# Altium PCB BackplanePCB.PcbDoc
Units mm, origin at the board's own origin, x right, y up, seen from the top; angles counter-clockwise.
Board outline 421.64 x 128.65 mm, 2 copper layers (Top Layer, Bottom Layer); 41 components, 109 nets, 458 pads, 12 vias.
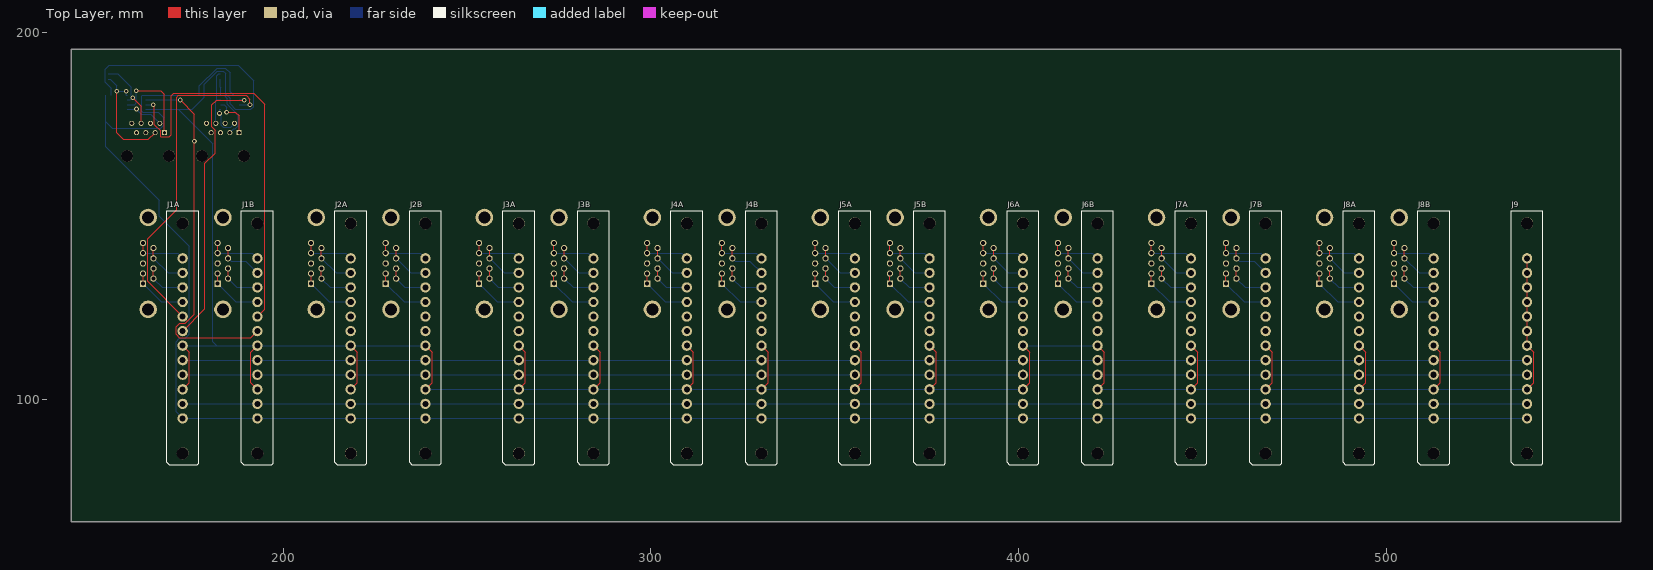
[diagram p0: Top Layer view]
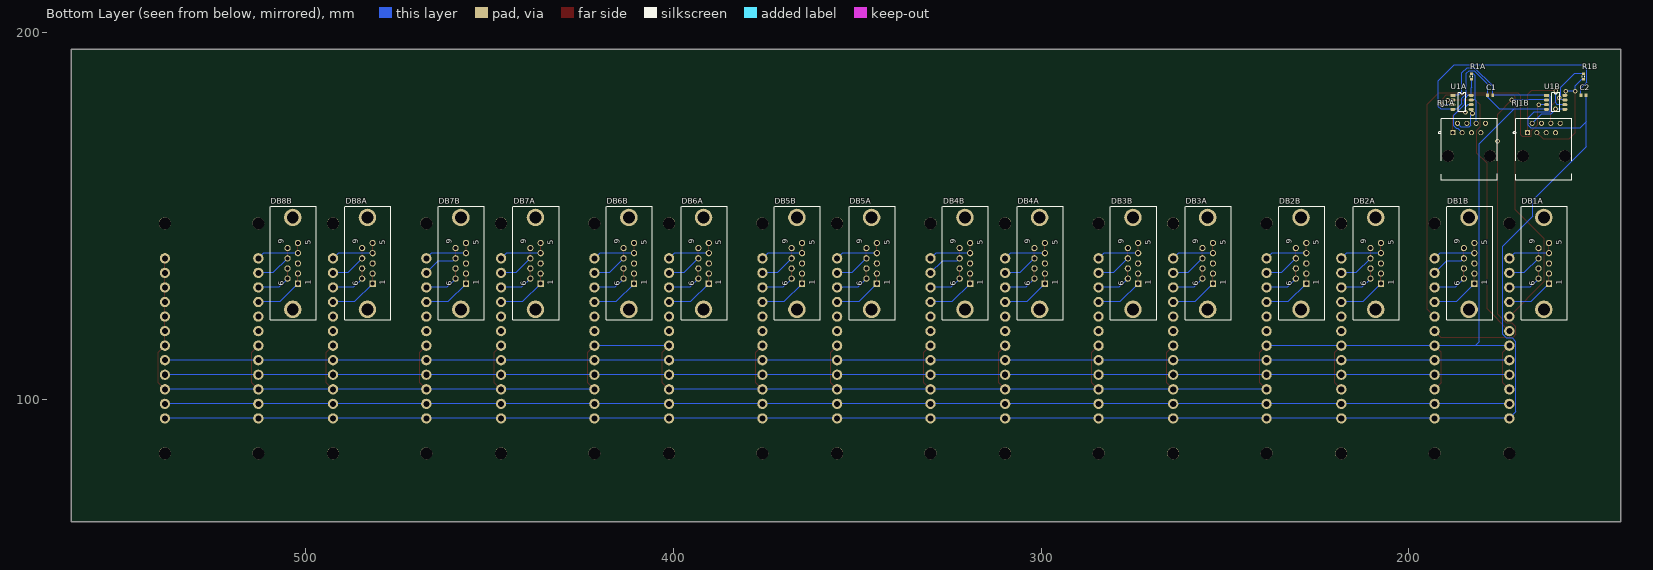
[diagram p1: Bottom Layer view, seen from below]
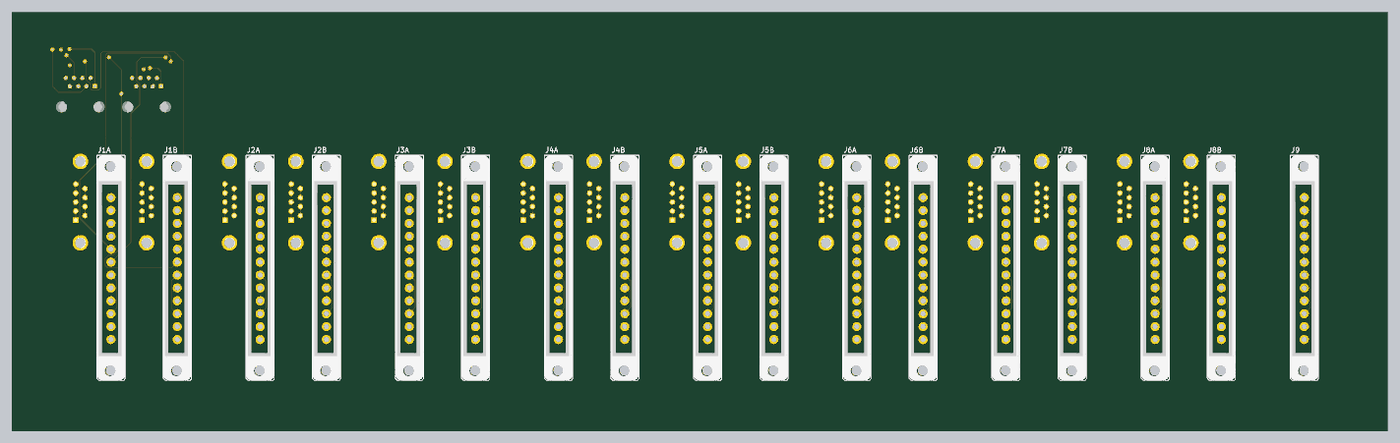
[diagram p2: 3D render of the assembled board from above, using the file's embedded part models]
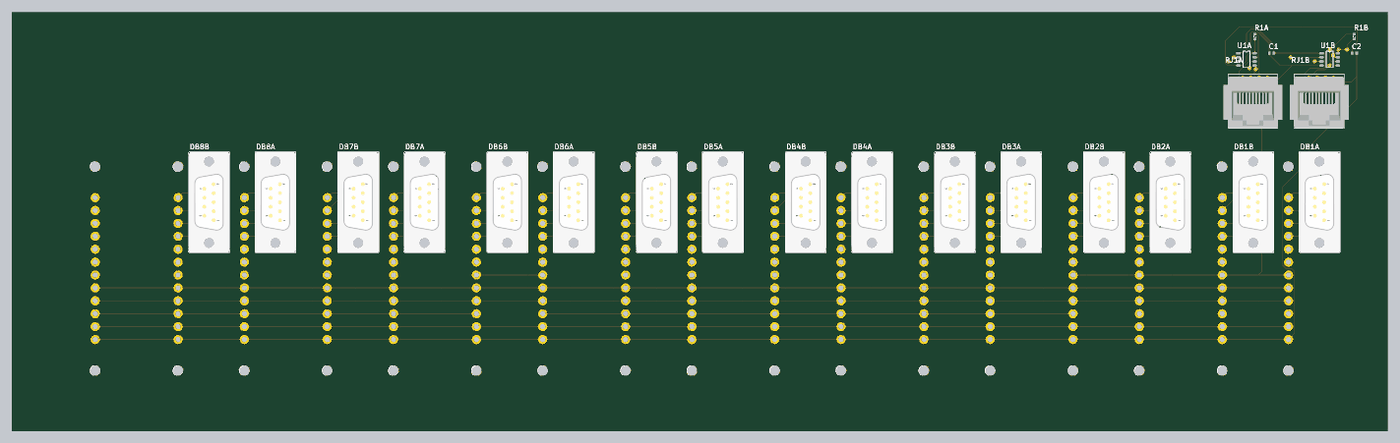
[diagram p3: 3D render of the assembled board from below, using the file's embedded part models]

## Layer stack, top to bottom
Top Solder: solder mask 0.0102, Solder Resist, Dk 3.5
Top Layer: signal copper 0.0356
Dielectric 1: dielectric 0.32, FR-4, Dk 4.8
Bottom Layer: signal copper 0.0356
Bottom Solder: solder mask 0.0102, Solder Resist, Dk 3.5

## Board outline
142.24,66.802 563.88,66.802 563.88,195.453 142.24,195.453

## Design rules (kind name [scope] priority, off if disabled: settings)
Clearance [All] p1: gap=0.254
PolygonConnect [All] p1: connectstyle=Relief reliefconductorwidth=0.254 reliefentries=4 polygonreliefangle="90 Angle" airgapwidth=0.254
RoutingVias [All] p1: holewidth=0.711 width=1.27 viastyle="Through Hole" minholewidth=0.711 minwidth=1.27 maxholewidth=0.711 maxwidth=1.27
SolderMaskExpansion [All] p1: expansion=0.102
UnpouredPolygon [All] p1: allowunpoured=FALSE
Width [All] p1: maxlimit=0.254 minlimit=0.254 preferedwidth=0.254
29 further rules are at their usual default settings.

## Classes and differential pairs
component class Backplane2: C1 C2 R1A R1B RJ1A RJ1B U1A U1B
component class Backplane: DB1A DB1B DB2A DB2B DB3A DB3B DB4A DB4B DB5A DB5B DB6A DB6B DB7A DB7B DB8A DB8B J1A J1B J2A J2B J3A J3B J4A J4B J5A J5B J6A J6B J7A J7B J8A J8B J9

## Components (designator, comment, footprint, x,y, rotation, side; value= is the part's Value field where it differs from the comment)
C1 "Cap Semi" 1608[0603] 177.8,182.88 r180 bottom
C2 "Cap Semi" 1608[0603] 152.4,182.88 r180 bottom
DB1A "D Connector 9" DSUB1.STRAIGHT 172.72,137.16 r90 bottom
DB1B "D Connector 9" DSUB1.STRAIGHT 193.04,137.16 r90 bottom
DB2A "D Connector 9" DSUB1.STRAIGHT 218.44,137.16 r90 bottom
DB2B "D Connector 9" DSUB1.STRAIGHT 238.76,137.16 r90 bottom
DB3A "D Connector 9" DSUB1.STRAIGHT 264.16,137.16 r90 bottom
DB3B "D Connector 9" DSUB1.STRAIGHT 284.48,137.16 r90 bottom
DB4A "D Connector 9" DSUB1.STRAIGHT 309.88,137.16 r90 bottom
DB4B "D Connector 9" DSUB1.STRAIGHT 330.2,137.16 r90 bottom
DB5A "D Connector 9" DSUB1.STRAIGHT 355.6,137.16 r90 bottom
DB5B "D Connector 9" DSUB1.STRAIGHT 375.92,137.16 r90 bottom
DB6A "D Connector 9" DSUB1.STRAIGHT 401.32,137.16 r90 bottom
DB6B "D Connector 9" DSUB1.STRAIGHT 421.64,137.16 r90 bottom
DB7A "D Connector 9" DSUB1.STRAIGHT 447.04,137.16 r90 bottom
DB7B "D Connector 9" DSUB1.STRAIGHT 467.36,137.16 r90 bottom
DB8A "D Connector 9" DSUB1.STRAIGHT 492.76,137.16 r90 bottom
DB8B "D Connector 9" DSUB1.STRAIGHT 513.08,137.16 r90 bottom
J1A "EDGECONNECTOR12" EDGECONNECTOR12 172.72,116.84 r90 top
J1B "EDGECONNECTOR12" EDGECONNECTOR12 193.04,116.84 r90 top
J2A "EDGECONNECTOR12" EDGECONNECTOR12 218.44,116.84 r90 top
J2B "EDGECONNECTOR12" EDGECONNECTOR12 238.76,116.84 r90 top
J3A "EDGECONNECTOR12" EDGECONNECTOR12 264.16,116.84 r90 top
J3B "EDGECONNECTOR12" EDGECONNECTOR12 284.48,116.84 r90 top
J4A "EDGECONNECTOR12" EDGECONNECTOR12 309.88,116.84 r90 top
J4B "EDGECONNECTOR12" EDGECONNECTOR12 330.2,116.84 r90 top
J5A "EDGECONNECTOR12" EDGECONNECTOR12 355.6,116.84 r90 top
J5B "EDGECONNECTOR12" EDGECONNECTOR12 375.92,116.84 r90 top
J6A "EDGECONNECTOR12" EDGECONNECTOR12 401.32,116.84 r90 top
J6B "EDGECONNECTOR12" EDGECONNECTOR12 421.64,116.84 r90 top
J7A "EDGECONNECTOR12" EDGECONNECTOR12 447.04,116.84 r90 top
J7B "EDGECONNECTOR12" EDGECONNECTOR12 467.36,116.84 r90 top
J8A "EDGECONNECTOR12" EDGECONNECTOR12 492.76,116.84 r90 top
J8B "EDGECONNECTOR12" EDGECONNECTOR12 513.08,116.84 r90 top
J9 "EDGECONNECTOR12" EDGECONNECTOR12 538.48,116.84 r90 top
R1A "" J1-0603 182.88,187.96 r90 bottom
R1B "" J1-0603 152.4,187.96 r90 bottom
RJ1A "85504-5001" RJ45.STRAIGHT 187.96,172.72 r180 bottom
RJ1B "85504-5001" RJ45.STRAIGHT 167.64,172.72 r180 bottom
U1A "SP3084EEN-L" SOICN8 187.96,182.88 r180 bottom
U1B "SP3084EEN-L" SOICN8 162.48,182.88 r180 bottom

## Footprints (in the part's own frame and the unit in brackets; to place one, negate y for a bottom-side part, rotate by r counter-clockwise, add the part's x,y. Pads: shape width x height; smd on the part's side, far side on the other; paste and mask are expansions set on the pad)
1608[0603] [mm] "Chip Capacitor, Body 1.6x0.8mm, IPC High Density"
  rect 0.8x0.9 smd: 1(-0.7,0) 2(0.7,0)
  body extent -0.87,-0.48 0.87,0.48, height 1.3
DSUB1.STRAIGHT [mm]
  round 4.76 hole 3.26: 0(-12.495,-9.5) 0(12.495,-9.5)
  rect 1.69x1.69 hole 1.09: 1(-5.54,-10.92)
  round 1.69 hole 1.09: 2(-2.77,-10.92) 3(0,-10.92) 4(2.77,-10.92) 5(5.54,-10.92) 6(-4.155,-8.08) 7(-1.385,-8.08) 8(1.385,-8.08) 9(4.155,-8.08)
  silkscreen extent -15.44,-15.9 15.42,-3.38, body extent -15.44,-15.9 15.37,-3.3, height 12.7
EDGECONNECTOR12 [mm]
  round 3.25 hole 3.25: 0(-31.387,0.127) 0(31.213,0.127)
  round 2.8 hole 1.65: 1(-21.867,0.127) 2(-17.907,0.127) 3(-13.947,0.127) 4(-9.987,0.127) 5(-6.027,0.127) 6(-2.067,0.127) 7(1.893,0.127) 8(5.853,0.127) 9(9.813,0.127) 10(13.773,0.127) 11(17.733,0.127) 12(21.693,0.127)
  silkscreen extent -34.42,-4.19 34.67,4.45, body extent -34.52,-4.19 34.64,4.44, height 11.63
J1-0603 [mm] "Chip Resistor, Body 1.6x0.8mm, IPC High Density"
  rect 0.7x0.9 smd: 1(-0.75,0) 2(0.75,0)
  silkscreen extent -0.2,-0.35 0.2,0.35, body extent -0.85,-0.48 0.85,0.48, height 0.9
RJ45.STRAIGHT [mil]
  round 128 hole 128: 0(-50,-250) 0(400,-250)
  rect 54x54 hole 36: 1(0,0)
  round 54 hole 36: 2(50,100) 3(100,0) 4(150,100) 5(200,0) 6(250,100) 7(300,0) 8(350,100)
  silkscreen extent -153,-510 475,148, body extent -180,-507 530,118, height 632
SOICN8 [mm]
  rect 1.4x0.8 smd: 1(0,0)
  oval 1.4x0.8 smd: 2(0,-1.27) 3(0,-2.54) 4(0,-3.81) 5(5,-3.81) 6(5,-2.54) 7(5,-1.27) 8(5,0)
  silkscreen extent 1.43,-4.45 3.56,0.63, body extent -0.38,-4.7 5.46,0.89, height 1

## Part data
C1 C2: "Capacitor (Semiconductor SIM Model)"
DB1A DB1B DB2A DB2B DB3A DB3B DB4A DB4B DB5A DB5B DB6A DB6B DB7A DB7B DB8A DB8B: "Receptacle Assembly, 9 Position, Right Angle"
R1A R1B: library part Res3, "Resistor"

## Via types
v1: diameter 1.27, hole 0.711, Top Layer to Bottom Layer, 12 vias

## Nets (pads, with @x,y where several pads share a name; then routed paths per layer and width w, separated by ;. In a path a pad name is that pad's centre, name@x,y a point inside that pad or via, vN(x,y) a via of type N, cw(c..) or ccw(c..) an arc to the next point about the centre after c; other vN are vias at no path point)
5V1A: DB1A.1 DB1A.2 J1A.9 | length 15.6
  Top Layer w0.254: DB1A.1 DB1A.2
  Bottom Layer w0.254: DB1A.1 166.767,126.653 J1A.9
5V1B: DB1B.1 DB1B.2 J1B.9 | length 15.6
  Top Layer w0.254: DB1B.1 DB1B.2
  Bottom Layer w0.254: DB1B.1 187.087,126.653 J1B.9
5V2A: DB2A.1 DB2A.2 J2A.9 | length 15.6
  Top Layer w0.254: DB2A.1 DB2A.2
  Bottom Layer w0.254: DB2A.1 212.487,126.653 J2A.9
5V2B: DB2B.1 DB2B.2 J2B.9 | length 15.6
  Top Layer w0.254: DB2B.1 DB2B.2
  Bottom Layer w0.254: DB2B.1 232.807,126.653 J2B.9
5V3A: DB3A.1 DB3A.2 J3A.9 | length 15.6
  Top Layer w0.254: DB3A.1 DB3A.2
  Bottom Layer w0.254: DB3A.1 258.207,126.653 J3A.9
5V3B: DB3B.1 DB3B.2 J3B.9 | length 15.6
  Top Layer w0.254: DB3B.1 DB3B.2
  Bottom Layer w0.254: DB3B.1 278.527,126.653 J3B.9
5V4A: DB4A.1 DB4A.2 J4A.9 | length 15.6
  Top Layer w0.254: DB4A.1 DB4A.2
  Bottom Layer w0.254: DB4A.1 303.927,126.653 J4A.9
5V4B: DB4B.1 DB4B.2 J4B.9 | length 15.6
  Top Layer w0.254: DB4B.1 DB4B.2
  Bottom Layer w0.254: DB4B.1 324.247,126.653 J4B.9
5V5A: DB5A.1 DB5A.2 J5A.9 | length 15.6
  Top Layer w0.254: DB5A.1 DB5A.2
  Bottom Layer w0.254: DB5A.1 349.647,126.653 J5A.9
5V5B: DB5B.1 DB5B.2 J5B.9 | length 15.6
  Top Layer w0.254: DB5B.1 DB5B.2
  Bottom Layer w0.254: DB5B.1 369.967,126.653 J5B.9
5V6A: DB6A.1 DB6A.2 J6A.9 | length 15.6
  Top Layer w0.254: DB6A.1 DB6A.2
  Bottom Layer w0.254: DB6A.1 395.367,126.653 J6A.9
5V6B: DB6B.1 DB6B.2 J6B.9 | length 15.6
  Top Layer w0.254: DB6B.1 DB6B.2
  Bottom Layer w0.254: DB6B.1 415.687,126.653 J6B.9
5V7A: DB7A.1 DB7A.2 J7A.9 | length 15.6
  Top Layer w0.254: DB7A.1 DB7A.2
  Bottom Layer w0.254: DB7A.1 441.087,126.653 J7A.9
5V7B: DB7B.1 DB7B.2 J7B.9 | length 15.6
  Top Layer w0.254: DB7B.1 DB7B.2
  Bottom Layer w0.254: DB7B.1 461.407,126.653 J7B.9
5V8A: DB8A.1 DB8A.2 J8A.9 | length 15.6
  Top Layer w0.254: DB8A.1 DB8A.2
  Bottom Layer w0.254: DB8A.1 486.807,126.653 J8A.9
5V8B: DB8B.1 DB8B.2 J8B.9 | length 15.6
  Top Layer w0.254: DB8B.1 DB8B.2
  Bottom Layer w0.254: DB8B.1 507.127,126.653 J8B.9
5VRTN1A: DB1A.6 DB1A.7 J1A.10 | length 11.7
  Top Layer w0.254: DB1A.6 DB1A.7
  Bottom Layer w0.254: DB1A.6 167.032,130.613 J1A.10
5VRTN1B: DB1B.6 DB1B.7 J1B.10 | length 11.7
  Top Layer w0.254: DB1B.6 DB1B.7
  Bottom Layer w0.254: DB1B.6 187.352,130.613 J1B.10
5VRTN2A: DB2A.6 DB2A.7 J2A.10 | length 11.7
  Top Layer w0.254: DB2A.6 DB2A.7
  Bottom Layer w0.254: DB2A.6 212.752,130.613 J2A.10
5VRTN2B: DB2B.6 DB2B.7 J2B.10 | length 11.7
  Top Layer w0.254: DB2B.6 DB2B.7
  Bottom Layer w0.254: DB2B.6 233.072,130.613 J2B.10
5VRTN3A: DB3A.6 DB3A.7 J3A.10 | length 11.7
  Top Layer w0.254: DB3A.6 DB3A.7
  Bottom Layer w0.254: DB3A.6 258.472,130.613 J3A.10
5VRTN3B: DB3B.6 DB3B.7 J3B.10 | length 11.7
  Top Layer w0.254: DB3B.6 DB3B.7
  Bottom Layer w0.254: DB3B.6 278.792,130.613 J3B.10
5VRTN4A: DB4A.6 DB4A.7 J4A.10 | length 11.7
  Top Layer w0.254: DB4A.6 DB4A.7
  Bottom Layer w0.254: DB4A.6 304.192,130.613 J4A.10
5VRTN4B: DB4B.6 DB4B.7 J4B.10 | length 11.7
  Top Layer w0.254: DB4B.6 DB4B.7
  Bottom Layer w0.254: DB4B.6 324.512,130.613 J4B.10
5VRTN5A: DB5A.6 DB5A.7 J5A.10 | length 11.7
  Top Layer w0.254: DB5A.6 DB5A.7
  Bottom Layer w0.254: DB5A.6 349.912,130.613 J5A.10
5VRTN5B: DB5B.6 DB5B.7 J5B.10 | length 11.7
  Top Layer w0.254: DB5B.6 DB5B.7
  Bottom Layer w0.254: DB5B.6 370.232,130.613 J5B.10
5VRTN6A: DB6A.6 DB6A.7 J6A.10 | length 11.7
  Top Layer w0.254: DB6A.6 DB6A.7
  Bottom Layer w0.254: DB6A.6 395.632,130.613 J6A.10
5VRTN6B: DB6B.6 DB6B.7 J6B.10 | length 11.7
  Top Layer w0.254: DB6B.6 DB6B.7
  Bottom Layer w0.254: DB6B.6 415.952,130.613 J6B.10
5VRTN7A: DB7A.6 DB7A.7 J7A.10 | length 11.7
  Top Layer w0.254: DB7A.6 DB7A.7
  Bottom Layer w0.254: DB7A.6 441.352,130.613 J7A.10
5VRTN7B: DB7B.6 DB7B.7 J7B.10 | length 11.7
  Top Layer w0.254: DB7B.6 DB7B.7
  Bottom Layer w0.254: DB7B.6 461.672,130.613 J7B.10
5VRTN8A: DB8A.6 DB8A.7 J8A.10 | length 11.7
  Top Layer w0.254: DB8A.6 DB8A.7
  Bottom Layer w0.254: DB8A.6 487.072,130.613 J8A.10
5VRTN8B: DB8B.6 DB8B.7 J8B.10 | length 11.7
  Top Layer w0.254: DB8B.6 DB8B.7
  Bottom Layer w0.254: DB8B.6 507.392,130.613 J8B.10
24V: J1A.2 J1B.2 J2A.2 J2B.2 J3A.2 J3B.2 J4A.2 J4B.2 J5A.2 J5B.2 J6A.2 J6B.2 J7A.2 J7B.2 J8A.2 J8B.2 J9.2 | length 365.8
  Bottom Layer w0.254: J1A.2 J1B.2 J2A.2 J2B.2 J3A.2 J3B.2 J4A.2 J4B.2 J5A.2 J5B.2 J6A.2 J6B.2 J7A.2 J7B.2 J8A.2 J8B.2 J9.2
+5V: C1.2 C2.2 J1A.1 J1B.1 J2A.1 J2B.1 J3A.1 J3B.1 J4A.1 J4B.1 J5A.1 J5B.1 J6A.1 J6B.1 J7A.1 J7B.1 J8A.1 J8B.1 J9.1 U1A.1 U1B.1 | length 533.2
  Bottom Layer w0.254: C2.2 151.7,175.706 ; U1A.1 186.487,182.88 185.471,183.896 185.471,188.976 184.164,190.283 181.963,190.283 177.1,185.42 C1.2 U1B.1 161.646,182.88 161.392,182.626 161.392,178.562 161.665,178.289 165.932,178.289 167.437,176.784 167.437,174.752 166.675,173.99 153.416,173.99 151.7,175.706 ; J9.1 J8B.1 J8A.1 J7B.1 J7A.1 J6B.1 J6A.1 J5B.1 J5A.1 J4B.1 J4A.1 J3B.1 J3A.1 J2B.1 J2A.1 J1B.1 J1A.1 170.79,96.776 170.79,115.849 171.704,116.764 173.304,116.764 174.396,117.856 174.396,141.884 166.243,150.038 166.243,154.305 151.7,168.848 151.7,175.706
-5V1A: DB1A.4 DB1A.5 J1A.12 | length 14.1
  Top Layer w0.254: DB1A.4 DB1A.5
  Bottom Layer w0.254: DB1A.4 171.196,139.93 J1A.12
-5V1B: DB1B.4 DB1B.5 J1B.12 | length 14.1
  Top Layer w0.254: DB1B.4 DB1B.5
  Bottom Layer w0.254: DB1B.4 191.516,139.93 J1B.12
-5V2A: DB2A.4 DB2A.5 J2A.12 | length 14.1
  Top Layer w0.254: DB2A.4 DB2A.5
  Bottom Layer w0.254: DB2A.4 216.916,139.93 J2A.12
-5V2B: DB2B.4 DB2B.5 J2B.12 | length 14.1
  Top Layer w0.254: DB2B.4 DB2B.5
  Bottom Layer w0.254: DB2B.4 237.236,139.93 J2B.12
-5V3A: DB3A.4 DB3A.5 J3A.12 | length 14.1
  Top Layer w0.254: DB3A.4 DB3A.5
  Bottom Layer w0.254: DB3A.4 262.636,139.93 J3A.12
-5V3B: DB3B.4 DB3B.5 J3B.12 | length 14.1
  Top Layer w0.254: DB3B.4 DB3B.5
  Bottom Layer w0.254: DB3B.4 282.956,139.93 J3B.12
-5V4A: DB4A.4 DB4A.5 J4A.12 | length 14.1
  Top Layer w0.254: DB4A.4 DB4A.5
  Bottom Layer w0.254: DB4A.4 308.356,139.93 J4A.12
-5V4B: DB4B.4 DB4B.5 J4B.12 | length 14.1
  Top Layer w0.254: DB4B.4 DB4B.5
  Bottom Layer w0.254: DB4B.4 328.676,139.93 J4B.12
-5V5A: DB5A.4 DB5A.5 J5A.12 | length 14.1
  Top Layer w0.254: DB5A.4 DB5A.5
  Bottom Layer w0.254: DB5A.4 354.076,139.93 J5A.12
-5V5B: DB5B.4 DB5B.5 J5B.12 | length 14.1
  Top Layer w0.254: DB5B.4 DB5B.5
  Bottom Layer w0.254: DB5B.4 374.396,139.93 J5B.12
-5V6A: DB6A.4 DB6A.5 J6A.12 | length 14.1
  Top Layer w0.254: DB6A.4 DB6A.5
  Bottom Layer w0.254: DB6A.4 399.796,139.93 J6A.12
-5V6B: DB6B.4 DB6B.5 J6B.12 | length 14.1
  Top Layer w0.254: DB6B.4 DB6B.5
  Bottom Layer w0.254: DB6B.4 420.116,139.93 J6B.12
-5V7A: DB7A.4 DB7A.5 J7A.12 | length 14.1
  Top Layer w0.254: DB7A.4 DB7A.5
  Bottom Layer w0.254: DB7A.4 445.516,139.93 J7A.12
-5V7B: DB7B.4 DB7B.5 J7B.12 | length 14.1
  Top Layer w0.254: DB7B.4 DB7B.5
  Bottom Layer w0.254: DB7B.4 465.836,139.93 J7B.12
-5V8A: DB8A.4 DB8A.5 J8A.12 | length 14.1
  Top Layer w0.254: DB8A.4 DB8A.5
  Bottom Layer w0.254: DB8A.4 491.236,139.93 J8A.12
-5V8B: DB8B.4 DB8B.5 J8B.12 | length 14.1
  Top Layer w0.254: DB8B.4 DB8B.5
  Bottom Layer w0.254: DB8B.4 511.556,139.93 J8B.12
-5VRTN1A: DB1A.8 DB1A.9 J1A.11 | length 12.4
  Top Layer w0.254: DB1A.8 DB1A.9
  Bottom Layer w0.254: DB1A.8 168.612,134.573 J1A.11
-5VRTN1B: DB1B.8 DB1B.9 J1B.11 | length 12.4
  Top Layer w0.254: DB1B.8 DB1B.9
  Bottom Layer w0.254: DB1B.8 185.786,137.719 189.767,137.719 J1B.11
-5VRTN2A: DB2A.8 DB2A.9 J2A.11 | length 12.4
  Top Layer w0.254: DB2A.8 DB2A.9
  Bottom Layer w0.254: DB2A.8 214.332,134.573 J2A.11
-5VRTN2B: DB2B.8 DB2B.9 J2B.11 | length 12.4
  Top Layer w0.254: DB2B.8 DB2B.9
  Bottom Layer w0.254: DB2B.8 234.652,134.573 J2B.11
-5VRTN3A: DB3A.8 DB3A.9 J3A.11 | length 12.4
  Top Layer w0.254: DB3A.8 DB3A.9
  Bottom Layer w0.254: DB3A.8 260.052,134.573 J3A.11
-5VRTN3B: DB3B.8 DB3B.9 J3B.11 | length 12.4
  Top Layer w0.254: DB3B.8 DB3B.9
  Bottom Layer w0.254: DB3B.8 280.372,134.573 J3B.11
-5VRTN4A: DB4A.8 DB4A.9 J4A.11 | length 12.4
  Top Layer w0.254: DB4A.8 DB4A.9
  Bottom Layer w0.254: DB4A.8 305.772,134.573 J4A.11
-5VRTN4B: DB4B.8 DB4B.9 J4B.11 | length 12.4
  Top Layer w0.254: DB4B.8 DB4B.9
  Bottom Layer w0.254: DB4B.8 322.946,137.719 326.927,137.719 J4B.11
-5VRTN5A: DB5A.8 DB5A.9 J5A.11 | length 12.4
  Top Layer w0.254: DB5A.8 DB5A.9
  Bottom Layer w0.254: DB5A.8 351.492,134.573 J5A.11
-5VRTN5B: DB5B.8 DB5B.9 J5B.11 | length 12.4
  Top Layer w0.254: DB5B.8 DB5B.9
  Bottom Layer w0.254: DB5B.8 371.812,134.573 J5B.11
-5VRTN6A: DB6A.8 DB6A.9 J6A.11 | length 12.4
  Top Layer w0.254: DB6A.8 DB6A.9
  Bottom Layer w0.254: DB6A.8 397.212,134.573 J6A.11
-5VRTN6B: DB6B.8 DB6B.9 J6B.11 | length 12.4
  Top Layer w0.254: DB6B.8 DB6B.9
  Bottom Layer w0.254: DB6B.8 417.532,134.573 J6B.11
-5VRTN7A: DB7A.8 DB7A.9 J7A.11 | length 12.4
  Top Layer w0.254: DB7A.8 DB7A.9
  Bottom Layer w0.254: DB7A.8 442.932,134.573 J7A.11
-5VRTN7B: DB7B.8 DB7B.9 J7B.11 | length 12.4
  Top Layer w0.254: DB7B.8 DB7B.9
  Bottom Layer w0.254: DB7B.8 460.106,137.719 464.087,137.719 J7B.11
-5VRTN8A: DB8A.8 DB8A.9 J8A.11 | length 12.4
  Top Layer w0.254: DB8A.8 DB8A.9
  Bottom Layer w0.254: DB8A.8 488.652,134.573 J8A.11
-5VRTN8B: DB8B.8 DB8B.9 J8B.11 | length 12.4
  Top Layer w0.254: DB8B.8 DB8B.9
  Bottom Layer w0.254: DB8B.8 508.972,134.573 J8B.11
GND: C1.1 C2.1 J1A.3 J1A.6 J1B.3 J1B.6 J2A.3 J2A.6 J2B.3 J2B.6 J3A.3 J3A.6 J3B.3 J3B.6 J4A.3 J4A.6 J4B.3 J4B.6 J5A.3 J5A.6 J5B.3 J5B.6 J6A.3 J6A.6 J6B.3 J6B.6 J7A.3 J7A.6 J7B.3 J7B.6 J8A.3 J8A.6 J8B.3 J8B.6 J9.3 J9.6 J9.7 J9.8 J9.9 J9.10 J9.11 J9.12 U1A.4 U1B.4 | length 787.3
  Top Layer w0.254: J1A.3 174.396,104.696 174.396,112.97 J1A.6 ; J1B.3 191.11,104.696 191.11,112.97 J1B.6 ; J2A.3 220.116,104.696 220.116,112.97 J2A.6 ; J2B.3 240.436,104.696 240.436,112.97 J2B.6 ; J3A.3 265.836,104.696 265.836,112.97 J3A.6 ; J3B.3 286.156,104.696 286.156,112.97 J3B.6 ; J4A.3 311.556,104.696 311.556,112.97 J4A.6 ; J4B.3 331.876,104.696 331.876,112.97 J4B.6 ; J5A.3 357.276,104.696 357.276,112.97 J5A.6 ; J5B.3 377.596,104.696 377.596,112.97 J5B.6 ; J6A.3 402.996,104.696 402.996,112.97 J6A.6 ; J6B.3 423.316,104.696 423.316,112.97 J6B.6 ; J7A.3 448.716,104.696 448.716,112.97 J7A.6 ; J7B.3 469.036,104.696 469.036,112.97 J7B.6 ; J8A.3 494.436,104.696 494.436,112.97 J8A.6 ; J8B.3 514.756,104.696 514.756,112.97 J8B.6 ; J9.3 540.156,104.696 540.156,112.97 J9.6 J9.7 J9.8 J9.9 J9.10 J9.11 J9.12
  Bottom Layer w0.254: C2.1 153.1,184.836 151.562,186.374 151.562,189.992 152.578,191.008 187.706,191.008 191.922,186.792 191.922,179.832 191.16,179.07 U1A.4 186.944,179.07 185.471,180.543 185.471,182.056 184.302,183.224 184.302,188.849 183.693,189.459 182.042,189.459 178.5,185.917 C1.1 178.5,182.372 175.198,179.07 171.45,179.07 ; U1B.4 167.599,179.07 171.45,179.07 ; J1A.6 181.823,114.773 ; J2B.3 J3A.3 J3B.3 J4A.3 J4B.3 J5A.3 J5B.3 J6A.3 ; J2B.6 J2A.6 J1B.6 182.753,114.773 181.823,114.773 ; J6A.6 J6B.6 ; J6B.3 J7A.3 J7B.3 J8A.3 J8B.3 J9.3 ; 171.45,179.07 180.772,169.748 180.772,115.824 181.823,114.773
NetR1A_1: R1A.1 RJ1A.3 U1A.8 | length 18.3
  Bottom Layer w0.254: R1A.1 182.88,185.068 182.96,184.988 U1A.8 183.845,182.88 184.709,182.016 184.709,180.442 187.757,177.394 187.757,174.6 186.944,173.787 186.487,173.787 RJ1A.3
NetR1A_2: R1A.2 RJ1A.6 U1A.7 | length 15.5
  Bottom Layer w0.254: RJ1A.6 181.61,181.356 181.864,181.61 182.118,181.61 ; R1A.2 182.372,188.71 181.864,188.202 181.864,181.864 182.118,181.61 ; U1A.7 182.118,181.61
NetR1B_1: R1B.1 RJ1B.3 U1B.8 | length 31.6
  Top Layer w0.254: v1(154.661,183.998) 154.661,172.695 156.464,170.891 163.271,170.891 RJ1B.3
  Bottom Layer w0.254: R1B.1 152.908,187.21 154.661,185.457 v1(154.661,183.998) v1(157.277,183.998) 157.277,182.88 U1B.8
NetR1B_2: R1B.2 RJ1B.6 U1B.7 | length 20.3
  Top Layer w0.254: v1(158.979,182.22) 161.29,179.908 RJ1B.6
  Bottom Layer w0.254: R1B.2 154.901,188.71 158.598,185.014 158.598,182.601 v1(158.979,182.22) 158.369,181.61 U1B.7
NetRJ1A_1: RJ1A.1 U1A.6 | length 11.6
  Top Layer w0.254: v1(184.531,178.308) 186.944,178.308 187.96,177.292 RJ1A.1
  Bottom Layer w0.254: U1A.6 183.871,180.34 184.531,179.68 v1(184.531,178.308)
NetRJ1A_2: RJ1A.2 U1A.5 | length 9.1
  Bottom Layer w0.254: U1A.5 182.651,179.07 182.651,177.978 v1(182.626,177.952) 183.083,177.495 183.083,174.752 183.642,174.193 185.623,174.193 RJ1A.2
NetRJ1B_1: RJ1B.1 U1B.6 | length 24.6
  Top Layer w0.254: v1(159.918,184.125) 166.624,184.125 167.64,183.109 RJ1B.1
  Bottom Layer w0.254: U1B.6 159.487,180.34 159.995,180.848 159.995,184.048 v1(159.918,184.125)
NetRJ1B_2: RJ1B.2 U1B.5 | length 10.5
  Bottom Layer w0.254: U1B.5 159.944,179.07 v1(160.02,179.146) 161.385,177.781 163.849,177.781 RJ1B.2
RX1A: J1A.7 U1A.2 | length 76.4
  Top Layer w0.254: J1A.7 178.664,124.804 178.664,164.363 181.407,167.107 181.407,173.431 180.543,174.295 180.543,180.264 181.864,181.585 v1(189.382,181.585)
  Bottom Layer w0.254: U1A.2 189.357,181.61 v1(189.382,181.585)
RX1B: J1B.7 U1B.2 | length 101
  Top Layer w0.254: v1(171.958,181.61) 175.793,177.775 v1(175.793,170.409) 175.793,123.342 173.355,120.904 171.806,120.904 170.79,119.888 170.79,117.856 171.704,116.942 191.122,116.942 J1B.7
  Bottom Layer w0.254: U1B.2 v1(171.958,181.61)
RX2A: J2A.7
RX2B: J2B.7
RX3A: J3A.7
RX3B: J3B.7
RX4A: J4A.7
RX4B: J4B.7
RX5A: J5A.7
RX5B: J5B.7
RX6A: J6A.7
RX6B: J6B.7
RX7A: J7A.7
RX7B: J7B.7
RX8A: J8A.7
RX8B: J8B.7
SCL: J1A.5 J1B.5 J2A.5 J2B.5 J3A.5 J3B.5 J4A.5 J4B.5 J5A.5 J5B.5 J6A.5 J6B.5 J7A.5 J7B.5 J8A.5 J8B.5 J9.5 | length 365.8
  Bottom Layer w0.254: J1A.5 J1B.5 J2A.5 J2B.5 J3A.5 J3B.5 J4A.5 J4B.5 J5A.5 J5B.5 J6A.5 J6B.5 J7A.5 J7B.5 J8A.5 J8B.5 J9.5
SDA: J1A.4 J1B.4 J2A.4 J2B.4 J3A.4 J3B.4 J4A.4 J4B.4 J5A.4 J5B.4 J6A.4 J6B.4 J7A.4 J7B.4 J8A.4 J8B.4 J9.4 | length 365.8
  Bottom Layer w0.254: J1A.4 J1B.4 J2A.4 J2B.4 J3A.4 J3B.4 J4A.4 J4B.4 J5A.4 J5B.4 J6A.4 J6B.4 J7A.4 J7B.4 J8A.4 J8B.4 J9.4
TX1A: J1A.8 U1A.3 | length 92
  Top Layer w0.254: J1A.8 163.043,132.243 163.043,143.916 170.942,151.816 170.942,182.372 171.45,182.88 189.89,182.88 190.906,181.864 v1(190.906,180.34)
  Bottom Layer w0.254: U1A.3 v1(190.906,180.34)
TX1B: J1B.8 U1B.3 | length 110.9
  Top Layer w0.254: v1(164.592,180.34) 164.643,180.34 164.897,180.086 164.897,174.904 166.573,173.228 166.573,171.653 168.885,171.653 169.443,172.212 169.443,182.728 170.18,183.464 191.922,183.464 194.92,180.467 194.92,124.7 J1B.8
  Bottom Layer w0.254: U1B.3 v1(164.592,180.34)
TX2A: J2A.8
TX2B: J2B.8
TX3A: J3A.8
TX3B: J3B.8
TX4A: J4A.8
TX4B: J4B.8
TX5A: J5A.8
TX5B: J5B.8
TX6A: J6A.8
TX6B: J6B.8
TX7A: J7A.8
TX7B: J7B.8
TX8A: J8A.8
TX8B: J8B.8
pads on no net: DB1A.0 DB1A.3 DB1B.0 DB1B.3 DB2A.0 DB2A.3 DB2B.0 DB2B.3 DB3A.0 DB3A.3 DB3B.0 DB3B.3 DB4A.0 DB4A.3 DB4B.0 DB4B.3 DB5A.0 DB5A.3 DB5B.0 DB5B.3 DB6A.0 DB6A.3 DB6B.0 DB6B.3 DB7A.0 DB7A.3 DB7B.0 DB7B.3 DB8A.0 DB8A.3 DB8B.0 DB8B.3 J1A.0 J1B.0 J2A.0 J2B.0 J3A.0 J3B.0 J4A.0 J4B.0 J5A.0 J5B.0 J6A.0 J6B.0 J7A.0 J7B.0 J8A.0 J8B.0 J9.0 RJ1A.0 RJ1A.4 RJ1A.5 RJ1A.7 RJ1A.8 RJ1B.0 RJ1B.4 RJ1B.5 RJ1B.7 RJ1B.8

## Text inside footprints (layer, text, board x,y; h text height)
DB1A: Bottom Overlay "1" at 158.345,131.37 h1.5 r270; Bottom Overlay "5" at 158.345,142.2 h1.5 r270; Bottom Overlay "9" at 165.735,142.494 h1.5 r270; Bottom Overlay "6" at 165.735,131.064 h1.5 r270
DB1B: Bottom Overlay "1" at 178.665,131.37 h1.5 r270; Bottom Overlay "5" at 178.665,142.2 h1.5 r270; Bottom Overlay "9" at 186.055,142.494 h1.5 r270; Bottom Overlay "6" at 186.055,131.064 h1.5 r270
DB2A: Bottom Overlay "1" at 204.065,131.37 h1.5 r270; Bottom Overlay "5" at 204.065,142.2 h1.5 r270; Bottom Overlay "9" at 211.455,142.494 h1.5 r270; Bottom Overlay "6" at 211.455,131.064 h1.5 r270
DB2B: Bottom Overlay "1" at 224.385,131.37 h1.5 r270; Bottom Overlay "5" at 224.385,142.2 h1.5 r270; Bottom Overlay "9" at 231.775,142.494 h1.5 r270; Bottom Overlay "6" at 231.775,131.064 h1.5 r270
DB3A: Bottom Overlay "1" at 249.785,131.37 h1.5 r270; Bottom Overlay "5" at 249.785,142.2 h1.5 r270; Bottom Overlay "9" at 257.175,142.494 h1.5 r270; Bottom Overlay "6" at 257.175,131.064 h1.5 r270
DB3B: Bottom Overlay "1" at 270.105,131.37 h1.5 r270; Bottom Overlay "5" at 270.105,142.2 h1.5 r270; Bottom Overlay "9" at 277.495,142.494 h1.5 r270; Bottom Overlay "6" at 277.495,131.064 h1.5 r270
DB4A: Bottom Overlay "1" at 295.505,131.37 h1.5 r270; Bottom Overlay "5" at 295.505,142.2 h1.5 r270; Bottom Overlay "9" at 302.895,142.494 h1.5 r270; Bottom Overlay "6" at 302.895,131.064 h1.5 r270
DB4B: Bottom Overlay "1" at 315.825,131.37 h1.5 r270; Bottom Overlay "5" at 315.825,142.2 h1.5 r270; Bottom Overlay "9" at 323.215,142.494 h1.5 r270; Bottom Overlay "6" at 323.215,131.064 h1.5 r270
DB5A: Bottom Overlay "1" at 341.225,131.37 h1.5 r270; Bottom Overlay "5" at 341.225,142.2 h1.5 r270; Bottom Overlay "9" at 348.615,142.494 h1.5 r270; Bottom Overlay "6" at 348.615,131.064 h1.5 r270
DB5B: Bottom Overlay "1" at 361.545,131.37 h1.5 r270; Bottom Overlay "5" at 361.545,142.2 h1.5 r270; Bottom Overlay "9" at 368.935,142.494 h1.5 r270; Bottom Overlay "6" at 368.935,131.064 h1.5 r270
DB6A: Bottom Overlay "1" at 386.945,131.37 h1.5 r270; Bottom Overlay "5" at 386.945,142.2 h1.5 r270; Bottom Overlay "9" at 394.335,142.494 h1.5 r270; Bottom Overlay "6" at 394.335,131.064 h1.5 r270
DB6B: Bottom Overlay "1" at 407.265,131.37 h1.5 r270; Bottom Overlay "5" at 407.265,142.2 h1.5 r270; Bottom Overlay "9" at 414.655,142.494 h1.5 r270; Bottom Overlay "6" at 414.655,131.064 h1.5 r270
DB7A: Bottom Overlay "1" at 432.665,131.37 h1.5 r270; Bottom Overlay "5" at 432.665,142.2 h1.5 r270; Bottom Overlay "9" at 440.055,142.494 h1.5 r270; Bottom Overlay "6" at 440.055,131.064 h1.5 r270
DB7B: Bottom Overlay "1" at 452.985,131.37 h1.5 r270; Bottom Overlay "5" at 452.985,142.2 h1.5 r270; Bottom Overlay "9" at 460.375,142.494 h1.5 r270; Bottom Overlay "6" at 460.375,131.064 h1.5 r270
DB8A: Bottom Overlay "1" at 478.385,131.37 h1.5 r270; Bottom Overlay "5" at 478.385,142.2 h1.5 r270; Bottom Overlay "9" at 485.775,142.494 h1.5 r270; Bottom Overlay "6" at 485.775,131.064 h1.5 r270
DB8B: Bottom Overlay "1" at 498.705,131.37 h1.5 r270; Bottom Overlay "5" at 498.705,142.2 h1.5 r270; Bottom Overlay "9" at 506.095,142.494 h1.5 r270; Bottom Overlay "6" at 506.095,131.064 h1.5 r270
RJ1A: Mechanical 2 ">Name" at 186.842,177.292 h1.97; Mechanical 4 ">Value" at 186.538,156.52 h1.97
RJ1B: Mechanical 2 ">Name" at 166.522,177.292 h1.97; Mechanical 4 ">Value" at 166.218,156.52 h1.97